# Altium PCB Battery_Schaltregler_PCB.PcbDoc
Units mm, origin at the board's own origin, x right, y up, seen from the top; angles counter-clockwise.
Board outline 60 x 40 mm, 2 copper layers (Top Layer, Bottom Layer), stack 1.671 mm thick; 24 components, 9 nets, 45 pads, 683 vias.
Unrouted connection lines stored in the file: 12.
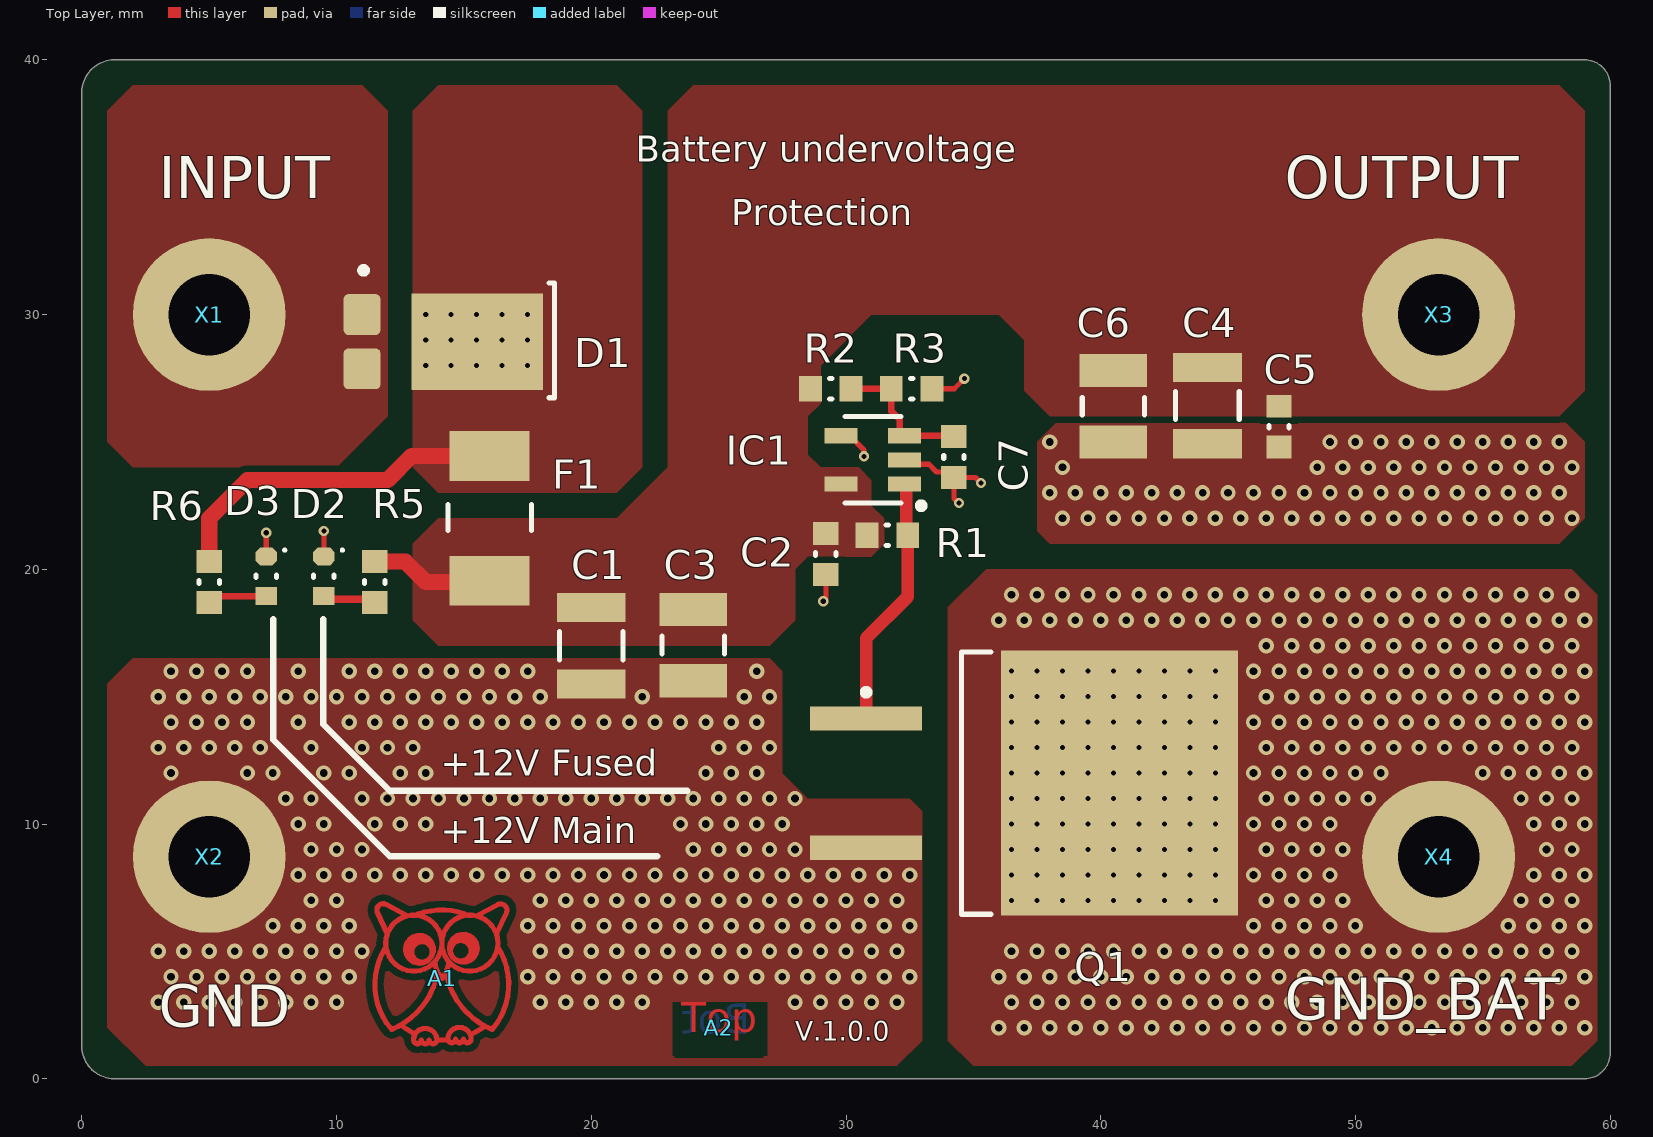
[diagram p0: Top Layer view]
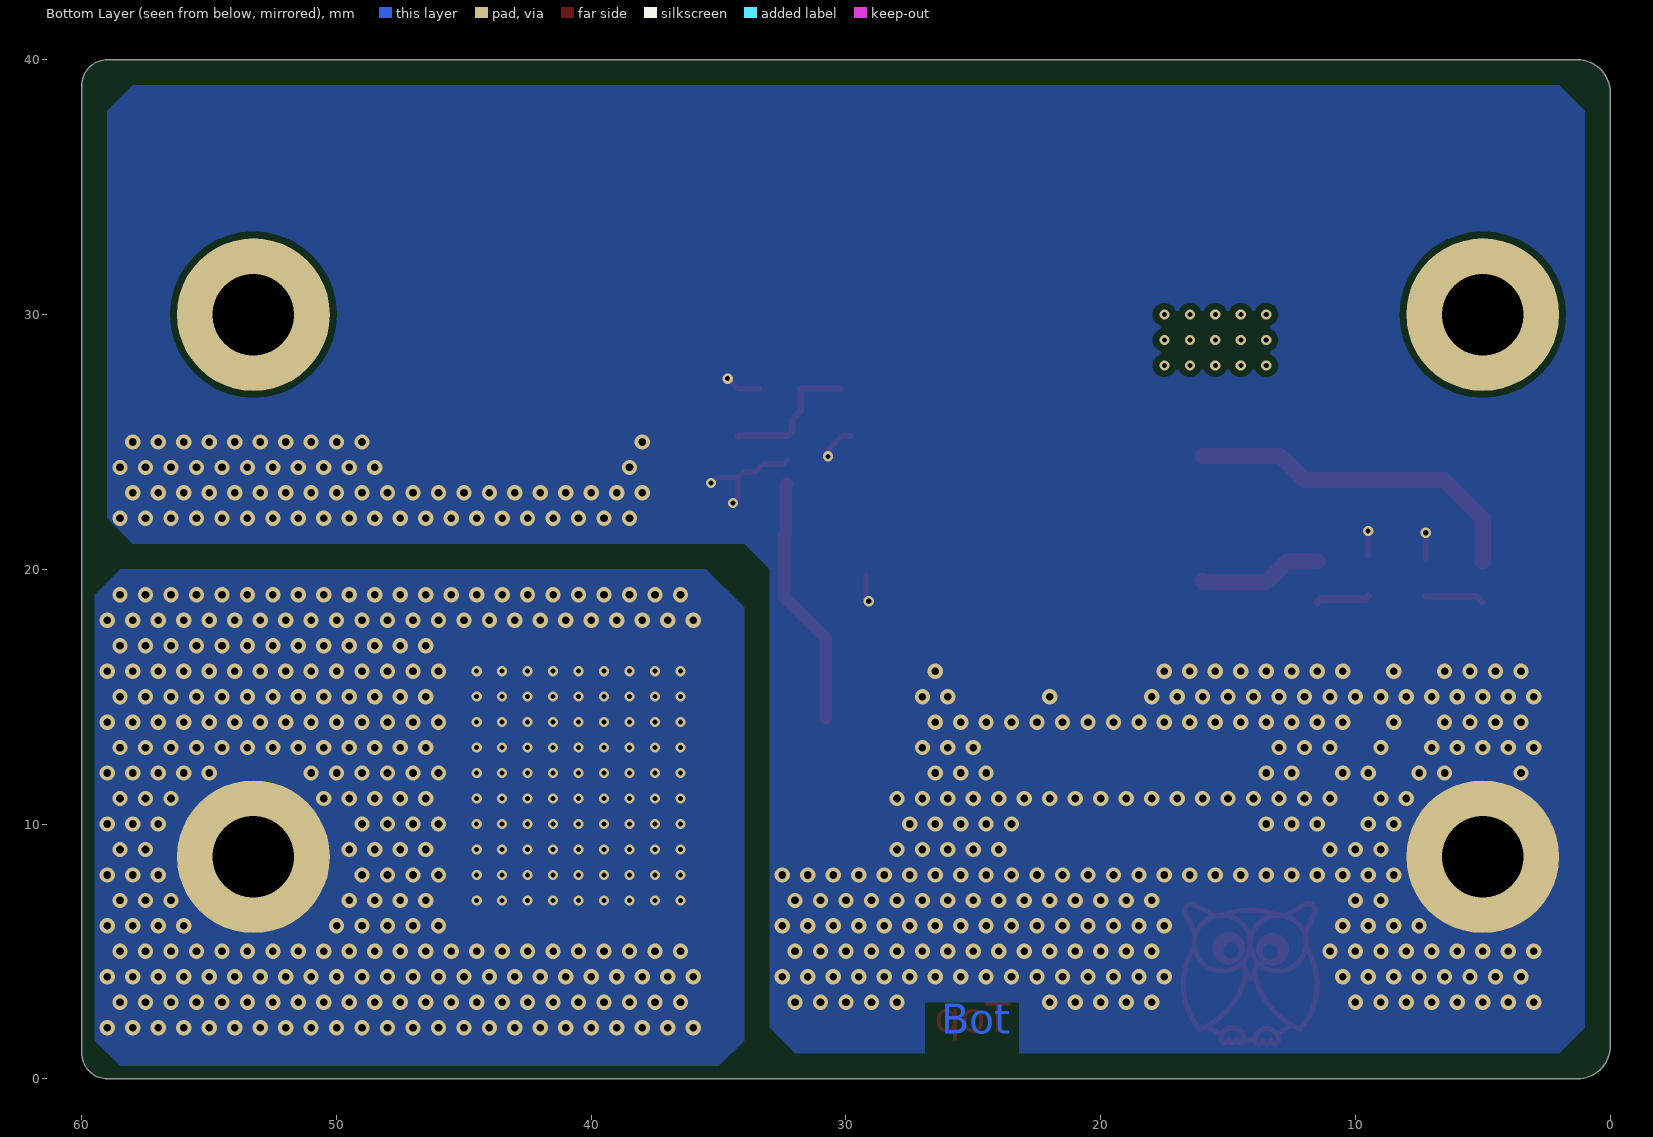
[diagram p1: Bottom Layer view, seen from below]

## Layer stack, top to bottom
Top Solder: solder mask 0.035, Solder Resist, Dk 3.5
Top Layer: signal copper 0.0356
Dielectric 1: dielectric 1.6, FR-4, Dk 4.5
Bottom Layer: signal copper 0.0356
Bottom Solder: solder mask 0.035, Solder Resist, Dk 3.5

## Board outline
0,1.27 ccw(c1.27,1.27) 1.27,0 59,0 ccw(c59,1) 60,1 60,39 ccw(c59,39) 59,40 1.27,40 ccw(c1.27,38.73) 0,38.73

## Design rules (kind name [scope] priority, off if disabled: settings)
BoardOutlineClearance [All] p1: gap=0.2 ignorepadtopadclearanceinfootprint=FALSE
Clearance [All] p1: gap=0.254 ignorepadtopadclearanceinfootprint=FALSE except(0: Arc-Hole Track-Hole SMDPad-Hole THPad-Hole Via-Hole Fill-Hole Poly-Hole Region-Hole Text-Hole)
DiffPairsRouting [All] p1: maxlimit=0.127 minlimit=0.127 mostfreqgap=0.127 toplayer_minwidth=0.136 toplayer_maxwidth=0.289 toplayer_prefwidth=0.197 bottomlayer_minwidth=0.136 bottomlayer_maxwidth=0.289 bottomlayer_prefwidth=0.197 impedanceprofiledriven=TRUE impedanceprofileid={A9F6D066-24EC-4661-9333-DF3FF1950C77} impedanceprofilevalue=100.000000 maxuncoupledlength=12.7
HoleSize [All] p1: absolutevalues=TRUE maxlimit=10 minlimit=0.2 maxpercent=80.000 minpercent=20.000
HoleToHoleClearance [All] p1: gap=0.5 allowstackedmicrovias=TRUE
MinimumSolderMaskSliver [All] p1: minsoldermaskwidth=0.2
PolygonConnect PolygonConnect_Power [InNet('Vfussed') vs InNet('Vfussed')] p1: connectstyle=Direct reliefconductorwidth=0.254 reliefentries=4 polygonreliefangle="90 Angle" airgapwidth=0.254
PolygonConnect PolygonConnect_Power_Out [InNet('Vcc_Out') vs InNet('Vcc_Out')] p2: connectstyle=Direct reliefconductorwidth=0.254 reliefentries=4 polygonreliefangle="90 Angle" airgapwidth=0.254
PolygonConnect [All] p3: connectstyle=Direct reliefconductorwidth=0.254 reliefentries=4 polygonreliefangle="90 Angle" airgapwidth=0.254
RoutingVias [All] p1: holewidth=0.2 width=0.4 viastyle="Through Hole" minholewidth=0.2 minwidth=0.4 maxholewidth=2 maxwidth=4
SilkToSilkClearance [All] p1: silktosilkclearance=0.15
SilkToSolderMaskClearance [IsPad] p1: minsilkscreentomaskgap=0.15 clearancetoexposedcopper=FALSE
SolderMaskExpansion [All] p1: expansion=0.05
UnRoutedNet [All] p1: checkbadconnections=TRUE
Width [All] p1: maxlimit=10 minlimit=0.127 preferedwidth=0.152
23 further rules are at their usual default settings.

## Components (designator, comment, footprint, x,y, rotation, side; value= is the part's Value field where it differs from the comment)
A1 "Logo_Mehdi" LOGO_MEHDI 14.148,3.937 r0 top
A2 "Stackup Window - 2 Layers" LAYER_WINDOW_2_LAYERS 25,2 r0 top
C1 "CAP-X7R_1210_25V_10uF" CAPC1210(3225)280_N 20,17 r90 top value=10µF
C2 "CAP-X7R_0603_50V_Generic" CAPC0603(1608)100_N 29.21,20.599 r90 top value=100nF
C3 "CAP-X7R_1210_25V_4.7uF" CAPC3225X20N 24,17.025 r90 top value=4.7µF
C4 "CAP-X7R_1210_25V_10uF" CAPC1210(3225)280_N 44.188,26.425 r90 top value=10µF
C5 "CAP-X7R_0603_50V_Generic" CAPC0603(1608)100_N 47,25.6 r90 top value=100nF
C6 "CAP-X7R_1210_25V_4.7uF" CAPC3225X20N 40.5,26.4 r90 top value=4.7µF
C7 "CAP-X7R_0603_50V_Generic" CAPC0603(1608)100_N 34.239,24.409 r90 top value=100nF
D1 "PMEG45U10EPDZ" DPAK213P650X82-3N 13.26,28.935 r0 top
D2 "LG L29K-G2J1-24-Z" SODFL170X85-2N 9.5,19.725 r270 top
D3 "LG L29K-G2J1-24-Z" SODFL170X85-2N 7.239,19.725 r270 top
F1 "0453010.MR" 6.10x2.69mm 16,22 r270 top
IC1 "MAX6457UKD3C+T" SOT95P280X125-5N 31.053,24.295 r180 top
Q1 "IPB60R060P7" TO263-3 36.992,11.608 r0 top
R1 "RES-0603_Generic" RESC0603(1608)_N 31.623,21.336 r0 top value=10k
R2 "RES-0603_Generic" RESC0603(1608)_N 29.402,27.089 r0 top value=1M
R3 "RES-0603_Generic" RESC0603(1608)_N 32.577,27.089 r180 top value=120k
R5 "RES-0603_Generic" RESC0603(1608)_N 11.5,19.5 r90 top value=Generic
R6 "RES-0603_Generic" RESC0603(1608)_N 5,19.5 r90 top value=Generic
X1 "SolderPad_6/3.2" SPAD_6/3.2 5,30 r0 top
X2 "SolderPad_6/3.2" SPAD_6/3.2 5,8.712 r0 top
X3 "SolderPad_6/3.2" SPAD_6/3.2 53.264,30 r0 top
X4 "SolderPad_6/3.2" SPAD_6/3.2 53.264,8.712 r0 top

## Footprints (in the part's own frame and the unit in brackets; to place one, negate y for a bottom-side part, rotate by r counter-clockwise, add the part's x,y. Pads: shape width x height; smd on the part's side, far side on the other; paste and mask are expansions set on the pad)
6.10x2.69mm [mm] "Chip Fusse Body 6.10x2.69mm, IPC Medium Density"
  rect 1.96x3.15 smd: 1(-2.45,0) 2(2.45,0)
  silkscreen extent -0.53,-1.63 0.47,1.65, body extent -1.67,-0.87 1.67,0.87, height 0.75
CAPC0603(1608)100_N [mm] "Chip Capacitor, Body 1.6x0.8mm, Height 1.0mm, IPC Medium Density"
  rect 0.9x1 smd: 1(-0.8,0) 2(0.8,0)
  silkscreen extent -0.05,-0.4 0.05,0.4, body extent -0.87,-0.48 0.88,0.47, height 1
CAPC1210(3225)280_N [mm] "Chip Capacitor, Body 3.2x2.5mm, Height 2.8mm, IPC Medium Density"
  rect 1.15x2.7 smd: 1(-1.5,0) 2(1.5,0)
  silkscreen extent -0.55,-1.25 0.55,1.25, body extent -1.7,-1.4 1.7,1.4, height 2.8
CAPC3225X20N [mm] "Chip Capacitor, 2-Leads, Body 3,20x2,50mm, IPC Medium Density"
  rect 1.3x2.65 smd: 1(-1.4,0) 2(1.4,0)
  silkscreen extent -0.35,-1.22 0.35,1.23, body extent -1.65,-1.3 1.65,1.3, height 2
DPAK213P650X82-3N [mm] "TO, 3-Pads, Body 5,50x5,56mm (max), IPC Medium Density"
  rrect25% 1.44x1.6 smd: 1(-2.26,1.065) 2(-2.26,-1.065)
  rect 5.16x3.8 smd: 3(2.26,0)
  silkscreen extent -2.32,-2.2 5.3,2.92
LAYER_WINDOW_2_LAYERS [mm] "Lagenfenster 2 Lagen"
  Top Layer pour cut-out: -1.8,1 -1.8,-1.1 1.9,-1.1 1.9,1
  Bottom Layer pour cut-out: -1.8,1 1.9,1 1.9,-1.1 -1.8,-1.1
LOGO_MEHDI [mm] "Logo Mehdi"
  Top Layer circle w0.2: c-0.793,1.044 r0.4
  Top Layer circle w0.2: c-1.117,1.385 r1.1
  Top Layer circle w0.2: c-0.893,1.144 r0.548
  Top Layer circle w0.2: c-0.839,1.093 r0.464
  Top Layer circle w0.2: c0.73,1.085 r0.4
  Top Layer circle w0.2: c1.083,1.385 r1.1
  Top Layer circle w0.2: c0.83,1.185 r0.548
  Top Layer circle w0.2: c0.775,1.134 r0.464
  Top Layer lines w0.2: -2.236,1.195 ccw(c0.054,-0.237) -1.997,-1.995 ; -2.168,1.782 -2.541,2.575 cw(c-2.317,2.685) -2.206,2.909 -1.417,2.485 ; -1.988,-2.004 ccw(c-3.134,0.769) -0.186,0.214 ; -1.613,-1.84 ccw(c0.052,0.285) -1.088,-2.163 ; -0.975,2.522 cw(c-0.017,-0.215) 0.9,2.536 ; -0.823,-2.416 cw(c-0.973,-2.416) -1.123,-2.416 cw(c-0.667,-2.416) -0.211,-2.416 cw(c-0.361,-2.416) -0.511,-2.416 ; -0.817,-2.415 ccw(c-0.667,-2.415) -0.517,-2.415 ; -0.291,0.651 ccw(c0.852,0.772) 0,0 ; -0.167,-2.407 ccw(c0.052,0.285) 0.17,-2.413 ; -0.033,0 ccw(c-0.886,0.772) 0.258,0.648 ; 0.152,0.214 ccw(c3.101,0.769) 1.955,-2.004 ; 0.524,-2.377 cw(c0.374,-2.377) 0.224,-2.377 cw(c0.68,-2.377) 1.136,-2.377 cw(c0.986,-2.377) 0.836,-2.377 ; 0.529,-2.375 ccw(c0.679,-2.375) 0.829,-2.375 ; 1.146,-2.184 ccw(c0.052,0.285) 1.675,-1.873 ; 1.391,2.475 2.181,2.9 cw(c2.291,2.675) 2.516,2.566 2.143,1.773 ; 1.963,-1.995 ccw(c-0.087,-0.237) 2.194,1.209
RESC0603(1608)_N [mm] "Chip Resistor, Body 1.6x0.8mm, IPC Medium Density"
  rect 0.9x1 smd: 1(-0.8,0) 2(0.8,0)
  silkscreen extent -0.05,-0.4 0.05,0.4, body extent -0.85,-0.47 0.85,0.47, height 0.6
SODFL170X85-2N [mm] "SOD-523F, 2-Leads, Body 0,90x1,70mm, IPC Medium Density"
  oct 0.7x0.85 smd: 1(-0.775,0)
  rect 0.7x0.85 smd: 2(0.775,0)
  silkscreen extent -1.07,-0.4 0.05,0.77, body extent -0.81,-0.4 0.81,0.4, height 0.6
SOT95P280X125-5N [mm] "SOT23, 5-Leads, Body 2,90x2,80mm, Pitch 0,95mm, IPC Medium Density"
  rect 1.3x0.6 smd: 1(-1.25,0.95) 2(-1.25,0) 3(-1.25,-0.95) 4(1.25,-0.95) 5(1.25,0.95)
  silkscreen extent -2.02,-1.7 1.1,1.92, body extent -1.5,-1.5 1.5,1.5, height 1.45
SPAD_6/3.2 [mm] "Solder Pad 6mm copper, 3.2mm hole"
  round 6 hole 3.2: 1(0,0)
TO263-3 [mm]
  rect 4.4x0.95 smd: 1(-6.2,2.54) 3(-6.2,-2.54)
  rect 9.3x10.4 smd: 2(3.75,0)
  silkscreen extent -6.32,-5.15 -1.3,5.15, body extent -2.45,-5.15 7,5.15, height 4.57

## Part data
A1: "Logo Mehdi"
A2: "Layer Stackup Window for 2 Layers (Top, Bottom)"
C1 C4: "Capacitor", ExactPartNumber=no, OpTempMax=125, OpTempMin=-55, Tolerance=20%, Voltage=25V, ComponentLink1Description=Datasheet, DesignedBy="Wilhelm Stellmach", LatestRevisionDate=03.07.2019, PackageReference="EIA 1210", PublishedDate=03.07.2019, Publisher="General Acoustics e.K", RoHS=yes, SMD/THT=SMD, SubType=X7R
C2 C5 C7: "Capacitor", ExactPartNumber=no, Tolerance=10%, Voltage=50V, ComponentLink1Description=Datasheet, DesignedBy="Wilhelm Stellmach", LatestRevisionDate=18.10.2017, PackageReference="EIA 0603", PublishedDate=18.10.2017, Publisher="General Acoustics e.K", RoHS=yes, SMD/THT=SMD, SubType=X7R
C3 C6: "Capacitor", ExactPartNumber=no, Tolerance=10%, Voltage=25V, ComponentLink1Description=Datasheet, DesignedBy="Wilhelm Stellmach", LatestRevisionDate=02.07.2019, PackageReference="EIA 1210", PublishedDate=02.07.2019, Publisher="General Acoustics e.K", RoHS=yes, SMD/THT=SMD, SubType=X7R
D1: "Shottky, 45 V, 10 A extremely low Vf barrier rectifier", Average Rectified Current=10A, Case/Package=SMD/SMT, Forward Voltage=490mV, Manufacturer 1="NXP Semiconductors", Max Operating Temperature=150°C, Max Reverse Voltage (DC)=45V, Min Operating Temperature=-55°C, Peak Non-Repetitive Surge Current=180A, Supplier Part Number 1=1727-1833-1-ND, Category="Schottky Diodes", ComponentLink1Description=http://components.arrow.com/part/dataview/65320857S809267N9188?src-supplier=Arrow+Electronics, ComponentLink1URL=http://components.arrow.com/part/dataview/65320857S809267N9188?src-supplier=Arrow+Electronics, ComponentLink2Description=http://www.nxp.com/documents/data_sheet/PMEG45U10EPD.pdf?src-supplier=Avnet, ComponentLink2URL=http://www.nxp.com/documents/data_sheet/PMEG45U10EPD.pdf?src-supplier=Avnet, ComponentLink3Description=https://assets.nexperia.com/documents/data-sheet/PMEG45U10EPD.pdf?src-supplier=Digi-Key, ComponentLink3URL=https://assets.nexperia.com/documents/data-sheet/PMEG45U10EPD.pdf?src-supplier=Digi-Key, DesignedBy="Mehdi EL Korch", Element Configuration="Common Anode", LatestRevisionDate=19.01.2022, Manufacturer Part Number 1=PMEG45U10EPDZ, Mount="Surface Mount", Number of Pins=3, Packaging="Tape and Reel", PublishedDate=19.01.2022, Publisher="Mehdi El Korch", Reverse Recovery Time=34ns, RoHS=Yes, Stock 1=459, Supplier 1=Digi-Key
D2 D3: "LED green 570nm, 4lm/W, 2.2...5.6mcd at 2mA, 3.4mW SmartLED", ExactPartNumber=yes, Manufacturer="OSRAM Opto Semiconductors", ManufacturerPartNumber="LG 29K-G2J1-24", Supplier Part Number 1=720-LGL29KG2J124Z, Voltage=1.7V, ComponentLink1Description=Datasheet, ComponentLink1URL=https://dammedia.osram.info/media/resource/hires/osram-dam-5662670/LG%20L29K_EN.pdf, DesignedBy="Marcus Schoeling", LatestRevisionDate=19.11.2021, PackageReference="EIA 0603", Pricing="1=0.463, 10=0.332, 25=0.272, 100=0.217 (EUR)", PublishedDate=19.06.2019, Publisher="General Acoustics", RoHS=yes, SMD/THT=SMD, State=Proven, SubType=LED, Supplier 1=Mouser
F1: "Fuse Chip Very Fast Acting 10A 125V SMD Solder Pad 2410 Ceramic T/R Automotive CE/CSA/PSE/UL", Case/Package=SMD/SMT, Current Rating=10A, DC Cold Resistance=5.6mR, Manufacturer 1=Littelfuse, Max Operating Temperature=125°C, Min Operating Temperature=-55°C, Package Quantity=1000, Supplier Part Number 1=F3141CT-ND, Voltage Rating (AC)=125V, Approvals=UL,CSA,PSE, Category=Fuses, ComponentLink1Description=https://datasheet.ciiva.com/26923/getdatasheetpartid-759298-26923394.pdf?src-supplier=Verical, ComponentLink1URL=https://datasheet.ciiva.com/26923/getdatasheetpartid-759298-26923394.pdf?src-supplier=Verical, ComponentLink2Description=https://datasheet.ciiva.com/1549/littelfuse-fuse-451-453-1549624.pdf?src-supplier=Element14, ComponentLink2URL=https://datasheet.ciiva.com/1549/littelfuse-fuse-451-453-1549624.pdf?src-supplier=Element14, ComponentLink3Description=https://datasheet.ciiva.com/300/littelfuse-fuse-451-453-300025.pdf?src-supplier=Digi-Key, ComponentLink3URL=https://datasheet.ciiva.com/300/littelfuse-fuse-451-453-300025.pdf?src-supplier=Digi-Key, ComponentLink4Description=https://datasheet.ciiva.com/46394/1788341-46394809.pdf?src-supplier=Element14, ComponentLink4URL=https://datasheet.ciiva.com/46394/1788341-46394809.pdf?src-supplier=Element14, ComponentLink5Description=https://datasheet.ciiva.com/300/littelfuse-fuse-451-453-300026.pdf?src-supplier=Digi-Key, ComponentLink5URL=https://datasheet.ciiva.com/300/littelfuse-fuse-451-453-300026.pdf?src-supplier=Digi-Key, ComponentLink6Description=https://datasheet.ciiva.com/16378/451-453-16378314.pdf?src-supplier=Future+Electronics, ComponentLink6URL=https://datasheet.ciiva.com/16378/451-453-16378314.pdf?src-supplier=Future+Electronics, ComponentLink7Description=https://datasheet.ciiva.com/26828/getdatasheetpartid-107149-26828650.pdf?src-supplier=Verical, ComponentLink7URL=https://datasheet.ciiva.com/26828/getdatasheetpartid-107149-26828650.pdf?src-supplier=Verical, ComponentLink8Description=https://datasheet.ciiva.com/300/littelfuse-fuse-451-453-300027.pdf?src-supplier=Digi-Key, ComponentLink8URL=https://datasheet.ciiva.com/300/littelfuse-fuse-451-453-300027.pdf?src-supplier=Digi-Key, Depth=2.69mm, DesignedBy="Mehdi El Korch", Fuse Current=10A, Fuse Type="Board Mount (Cartridge Style Excluded)", Height=0.106inch, Housing Material=Ceramic, LatestRevisionDate=15.01.2022, Lead Free="Lead Free", Length=6.1mm, Manufacturer Part Number 1=0453010.MR, Mount="Surface Mount", Number of Pins=2, Packaging="Tape and Reel", PublishedDate=15.01.2022, Publisher="Mehdi El Korch", Radiation Hardening=No, REACH SVHC="No SVHC", Resistance=5.6mR, RoHS=Yes, RoHS Compliant=Yes, Series=453, Size=2.69mm, Stock 1=3711, Supplier 1=Digi-Key, Voltage Rating (DC)=125V, Width=0.106inch, Working Voltage=125V
IC1: "Volt Supervisor Monitor 4V to 28V 5-Pin SOT-23 T/R", Case/Package=SOT-23, Manufacturer 1=Maxim, Max Operating Temperature=125°C, Max Power Dissipation=571mW, Max Reset Threshold Voltage=1.151V, Max Supply Voltage=28V, Min Operating Temperature=-40°C, Min Reset Threshold Voltage=1.071V, Min Supply Voltage=4V, Nominal Supply Current=6.5uA, Number of Voltages Monitored=1, Package Quantity=2500, Supplier Part Number 1=1913670, Category="Voltage Supervisors", ComponentLink1Description=https://datasheet.ciiva.com/1178/max6457-max6460-1178848.pdf?src-supplier=Newark, ComponentLink1URL=https://datasheet.ciiva.com/1178/max6457-max6460-1178848.pdf?src-supplier=Newark, ComponentLink2Description=https://datasheet.ciiva.com/1972/max6457-max6460-1972992.pdf?src-supplier=Digi-Key, ComponentLink2URL=https://datasheet.ciiva.com/1972/max6457-max6460-1972992.pdf?src-supplier=Digi-Key, ComponentLink3Description=https://datasheet.ciiva.com/1972/max6457-max6460-1972993.pdf?src-supplier=Digi-Key, ComponentLink3URL=https://datasheet.ciiva.com/1972/max6457-max6460-1972993.pdf?src-supplier=Digi-Key, ComponentLink4Description=https://datasheet.ciiva.com/1972/max6457-max6460-1972994.pdf?src-supplier=Digi-Key, ComponentLink4URL=https://datasheet.ciiva.com/1972/max6457-max6460-1972994.pdf?src-supplier=Digi-Key, ComponentLink5Description=https://datasheet.ciiva.com/14376/max6457-max6460-14376405.pdf?src-supplier=Avnet, ComponentLink5URL=https://datasheet.ciiva.com/14376/max6457-max6460-14376405.pdf?src-supplier=Avnet, DesignedBy="Mehdi EL korch", LatestRevisionDate=14.01.2022, Lead Free="Lead Free", Manufacturer Part Number 1=MAX6457UKD3C+T, Mount="Surface Mount", Number of Pins=5, Operating Supply Current=6.5uA, Overvoltage Threshold=1.151V, Packaging="Cut Tape", Pricing 1="5=3,42200, 10=3,07600, 25=2,92400, 100=2,40000, 250=2,14400 (EUR)", PublishedDate=14.01.2022, Publisher="Mehdi EL Korch", Radiation Hardening=No, REACH SVHC=Unknown, Reset="Active Low", Reset Timeout=90ms, RoHS=Yes, RoHS Compliant=Yes, Series="MAX6457, MAX6458, MAX6459, MAX6460", Stock 1=430, Supplier 1=RSComponents, Supply Current=6.5uA, Threshold Voltage=1.151V, Type="Simple Reset/Power-On Reset", Undervoltage Threshold=1.071V, Watchdog Timer=No
Q1: "MOSFET, N-CH, 600V, 48A, 151A Pulse, 50mOhm, Qg 67nC", ExactPartNumber=yes, Manufacturer=Infineon, Supplier Part Number 1=IPB60R060P7ATMA1CT-ND, ComponentLink1Description=Datasheet, ComponentLink1URL=https://www.infineon.com/dgdl/Infineon-IPB60R060P7-DS-v02_00-EN.pdf?fileId=5546d4625ee5d4cd015f2a6b797c047f, DesignedBy="Wilhelm Stellmach", LatestRevisionDate=15.05.2018, ManufacturerPartNumber=IPB60R060P7, PackageReference=TO263-3, Pricing="1=6.38, 10=5.694, 100=4.6693, 500=3.78096 (EUR)", PublishedDate=15.05.2018, Publisher="General Acoustics", RoHS=yes, SMD/THT=SMD, Supplier 1=Digi-Key
R1 R2 R3 R5 R6: "Resistor", ExactPartNumber=no, Tolerance=1%, ComponentLink1Description=Datasheet, DesignedBy="Wilhelm Stellmach", LatestRevisionDate=18.10.2017, PackageReference="EIA 0603", PublishedDate=18.10.2017, Publisher="General Acoustics e.K", RoHS=yes, SMD/THT=SMD, SubType="1/10 W"
X1 X2 X3 X4: "Solder Pad, 6mm copper, 3.2mm hole", ExactPartNumber=no, ManufacturerPartNumber=6/3.2, ComponentLink1Description=Datasheet, ComponentLink1URL=http://www.fischerelektronik.de/web_fischer/de_DE/Steckverbinder/G01/Stiftleisten/PR/SL%2011%20SMD%20062%204/$productCard/parameters/datasheet.xhtml, DesignedBy="Wilhelm Stellmach", LatestRevisionDate=06.06.2019, PublishedDate=06.06.2019, Publisher="General Acoustics e.K.", RoHS=yes, SMD/THT=SMD

## Via types
v1: diameter 0.6, hole 0.3, Top Layer to Bottom Layer, tented both sides, 571 vias
v2: diameter 0.4, hole 0.2, Top Layer to Bottom Layer, tented bottom, 105 vias
v3: diameter 0.4, hole 0.2, Top Layer to Bottom Layer, tented both sides, 7 vias

## Nets (pads, with @x,y where several pads share a name; then routed paths per layer and width w, separated by ;. In a path a pad name is that pad's centre, name@x,y a point inside that pad or via, vN(x,y) a via of type N, cw(c..) or ccw(c..) an arc to the next point about the centre after c; other vN are vias at no path point)
GND: C1.1 C2.1 C3.1 C4.1 C5.1 C6.1 C7.1 D2.1 D3.1 IC1.2 IC1.4 Q1.3 R3.1 X2.1 | length 10.4
  Top Layer w0.203: D3.1@7.239,20.435 v3(7.239,21.435) ; D2.1 v3(9.5,21.5) ; v3(29.108,18.745) 29.21,18.847 C2.1 ; IC1.4 30.153,25.245 30.709,24.689 v3(30.709,24.435) ; IC1.2 32.477,24.121 33.258,24.121 33.553,23.825 34.023,23.825 C7.1 ; R3.1 34.252,27.089 v3(34.646,27.483) ; v3(34.442,22.606) 34.417,22.606 34.239,22.784 C7.1 ; v3(35.306,23.393) 35.09,23.609 C7.1
  other v1: 3,3 4,3 5,3 6,3 7,3 8,3 9,3 10,3 18,3 19,3 20,3 21,3 22,3 28,3 29,3 30,3 31,3 32,3 3.5,4 4.5,4 5.5,4 6.5,4 7.5,4 8.5,4 9.5,4 10.5,4 17.5,4 18.5,4 19.5,4 20.5,4 21.5,4 22.5,4 23.5,4 24.5,4 25.5,4 26.5,4 27.5,4 28.5,4 29.5,4 30.5,4 31.5,4 32.5,4 3,5 4,5 5,5 6,5 7,5 8,5 9,5 10,5 11,5 18,5 19,5 20,5 21,5 22,5 23,5 24,5 25,5 26,5 27,5 28,5 29,5 30,5 31,5 32,5 7.5,6 8.5,6 9.5,6 10.5,6 17.5,6 18.5,6 19.5,6 20.5,6 21.5,6 22.5,6 23.5,6 24.5,6 25.5,6 26.5,6 27.5,6 28.5,6 29.5,6 30.5,6 31.5,6 32.5,6 9,7 10,7 18,7 19,7 20,7 21,7 22,7 23,7 24,7 25,7 26,7 27,7 28,7 29,7 30,7 31,7 32,7 8.5,8 9.5,8 10.5,8 11.5,8 12.5,8 13.5,8 14.5,8 15.5,8 16.5,8 17.5,8 18.5,8 19.5,8 20.5,8 21.5,8 22.5,8 23.5,8 24.5,8 25.5,8 26.5,8 27.5,8 28.5,8 29.5,8 30.5,8 31.5,8 32.5,8 9,9 10,9 11,9 24,9 25,9 26,9 27,9 28,9 8.5,10 9.5,10 11.5,10 12.5,10 13.5,10 23.5,10 24.5,10 25.5,10 26.5,10 27.5,10 8,11 9,11 11,11 12,11 13,11 14,11 15,11 16,11 17,11 18,11 19,11 20,11 21,11 22,11 23,11 24,11 25,11 26,11 27,11 28,11 3.5,12 6.5,12 7.5,12 9.5,12 10.5,12 12.5,12 13.5,12 24.5,12 25.5,12 26.5,12 3,13 4,13 5,13 6,13 7,13 9,13 11,13 12,13 13,13 25,13 26,13 27,13 3.5,14 4.5,14 5.5,14 6.5,14 8.5,14 10.5,14 11.5,14 12.5,14 13.5,14 14.5,14 15.5,14 16.5,14 17.5,14 18.5,14 19.5,14 20.5,14 21.5,14 22.5,14 23.5,14 24.5,14 25.5,14 26.5,14 3,15 4,15 5,15 6,15 7,15 8,15 9,15 10,15 11,15 12,15 13,15 14,15 15,15 16,15 17,15 18,15 22,15 26,15 27,15 3.5,16 4.5,16 5.5,16 6.5,16 8.5,16 10.5,16 11.5,16 12.5,16 13.5,16 14.5,16 15.5,16 16.5,16 17.5,16 26.5,16 38.5,22 39.5,22 40.5,22 41.5,22 42.5,22 43.5,22 44.5,22 45.5,22 46.5,22 47.5,22 48.5,22 49.5,22 50.5,22 51.5,22 52.5,22 53.5,22 54.5,22 55.5,22 56.5,22 57.5,22 58.5,22 38,23 39,23 40,23 41,23 42,23 43,23 44,23 45,23 46,23 47,23 48,23 49,23 50,23 51,23 52,23 53,23 54,23 55,23 56,23 57,23 58,23 38.5,24 48.5,24 49.5,24 50.5,24 51.5,24 52.5,24 53.5,24 54.5,24 55.5,24 56.5,24 57.5,24 58.5,24 38,25 49,25 50,25 51,25 52,25 53,25 54,25 55,25 56,25 57,25 58,25
GND_bat: Q1.2 X4.1
  other v1: 36,2 37,2 38,2 39,2 40,2 41,2 42,2 43,2 44,2 45,2 46,2 47,2 48,2 49,2 50,2 51,2 52,2 53,2 54,2 55,2 56,2 57,2 58,2 59,2 36.5,3 37.5,3 38.5,3 39.5,3 40.5,3 41.5,3 42.5,3 43.5,3 44.5,3 45.5,3 46.5,3 47.5,3 48.5,3 49.5,3 50.5,3 51.5,3 52.5,3 53.5,3 54.5,3 55.5,3 56.5,3 57.5,3 58.5,3 36,4 37,4 38,4 39,4 40,4 41,4 42,4 43,4 44,4 45,4 46,4 47,4 48,4 49,4 50,4 51,4 52,4 53,4 54,4 55,4 56,4 57,4 58,4 59,4 36.5,5 37.5,5 38.5,5 39.5,5 40.5,5 41.5,5 42.5,5 43.5,5 44.5,5 45.5,5 46.5,5 47.5,5 48.5,5 49.5,5 50.5,5 51.5,5 52.5,5 53.5,5 54.5,5 55.5,5 56.5,5 57.5,5 58.5,5 46,6 47,6 48,6 49,6 50,6 56,6 57,6 58,6 59,6 46.5,7 47.5,7 48.5,7 49.5,7 56.5,7 57.5,7 58.5,7 46,8 47,8 48,8 49,8 57,8 58,8 59,8 46.5,9 47.5,9 48.5,9 49.5,9 57.5,9 58.5,9 46,10 47,10 48,10 49,10 57,10 58,10 59,10 46.5,11 47.5,11 48.5,11 49.5,11 50.5,11 56.5,11 57.5,11 58.5,11 46,12 47,12 48,12 49,12 50,12 51,12 55,12 56,12 57,12 58,12 59,12 46.5,13 47.5,13 48.5,13 49.5,13 50.5,13 51.5,13 52.5,13 53.5,13 54.5,13 55.5,13 56.5,13 57.5,13 58.5,13 46,14 47,14 48,14 49,14 50,14 51,14 52,14 53,14 54,14 55,14 56,14 57,14 58,14 59,14 46.5,15 47.5,15 48.5,15 49.5,15 50.5,15 51.5,15 52.5,15 53.5,15 54.5,15 55.5,15 56.5,15 57.5,15 58.5,15 46,16 47,16 48,16 49,16 50,16 51,16 52,16 53,16 54,16 55,16 56,16 57,16 58,16 59,16 46.5,17 47.5,17 48.5,17 49.5,17 50.5,17 51.5,17 52.5,17 53.5,17 54.5,17 55.5,17 56.5,17 57.5,17 58.5,17 36,18 37,18 38,18 39,18 40,18 41,18 42,18 43,18 44,18 45,18 46,18 47,18 48,18 49,18 50,18 51,18 52,18 53,18 54,18 55,18 56,18 57,18 58,18 59,18 36.5,19 37.5,19 38.5,19 39.5,19 40.5,19 41.5,19 42.5,19 43.5,19 44.5,19 45.5,19 46.5,19 47.5,19 48.5,19 49.5,19 50.5,19 51.5,19 52.5,19 53.5,19 54.5,19 55.5,19 56.5,19 57.5,19 58.5,19
  other v2: 36.5,7 37.5,7 38.5,7 39.5,7 40.5,7 41.5,7 42.5,7 43.5,7 44.5,7 36.5,8 37.5,8 38.5,8 39.5,8 40.5,8 41.5,8 42.5,8 43.5,8 44.5,8 36.5,9 37.5,9 38.5,9 39.5,9 40.5,9 41.5,9 42.5,9 43.5,9 44.5,9 36.5,10 37.5,10 38.5,10 39.5,10 40.5,10 41.5,10 42.5,10 43.5,10 44.5,10 36.5,11 37.5,11 38.5,11 39.5,11 40.5,11 41.5,11 42.5,11 43.5,11 44.5,11 36.5,12 37.5,12 38.5,12 39.5,12 40.5,12 41.5,12 42.5,12 43.5,12 44.5,12 36.5,13 37.5,13 38.5,13 39.5,13 40.5,13 41.5,13 42.5,13 43.5,13 44.5,13 36.5,14 37.5,14 38.5,14 39.5,14 40.5,14 41.5,14 42.5,14 43.5,14 44.5,14 36.5,15 37.5,15 38.5,15 39.5,15 40.5,15 41.5,15 42.5,15 43.5,15 44.5,15 36.5,16 37.5,16 38.5,16 39.5,16 40.5,16 41.5,16 42.5,16 43.5,16 44.5,16
NetC7_2: C7.2 IC1.3 R2.2 R3.2 | length 5.6
  Top Layer w0.254: R2.2 R3.2 31.777,26.211 32.106,25.883 32.106,25.418 32.279,25.245 IC1.3 34.204,25.245 C7.2
NetD2_2: D2.2 R5.1 | length 2.1
  Top Layer w0.305: D2.2 9.625,18.825 11.375,18.825 R5.1
NetD3_2: D3.2 R6.1 | length 2.3
  Top Layer w0.254: R6.1 5.25,18.95 D3.2
NetIC1_1: IC1.1 Q1.1 R1.2 | length 9.9
  Top Layer w0.5: Q1.1 30.792,17.292 32.423,18.923 R1.2 32.363,21.396 32.363,23.295 32.313,23.345 IC1.1
Vfussed: C1.2 C2.2 C3.2 C4.2 C5.2 C6.2 F1.2 IC1.5 R1.1 R2.1 R5.2 X3.1 | length 4.9
  Top Layer w0.635: R5.2 12.7,20.3 13.5,19.5 15.95,19.5 F1.2
Vin: D1.1 D1.2 X1.1
Vmain: D1.3 F1.1 R6.2 | length 13.7
  Top Layer w0.635: R6.2 5,22 6.5,23.5 12,23.5 12.95,24.45 F1.1
  other v2: 13.5,28 14.5,28 15.5,28 16.5,28 17.5,28 13.5,29 14.5,29 15.5,29 16.5,29 17.5,29 13.5,30 14.5,30 15.5,30 16.5,30 17.5,30

## Polygon pours and split planes (outlines as drawn)
GND_bat on Top Layer "GND_BAT_Bottem" (solid, pour order 42): 35.5,20 34,18.5 34,1.5 35,0.5 58.5,0.5 59.5,1.5 59.5,19 58.5,20
GND on Top Layer "GND-TOP-IN" (solid, pour order 26): 27,16.5 27.5,16 27.5,12 28.5,11 32.5,11 33,10.5 33,1.5 32,0.5 2.5,0.5 1,2 1,15.5 2,16.5
Vfussed on Top Layer "Vfussed-Top" (solid, pour order 20): 14,22 13,21 13,18 14,17 27,17 28,18 28,20 28.5,20.5 30.25,20.5 31,20.5 31.5,21 31.5,22 31,22.5 31,23.5 30.5,24 29,24 28.5,24.5 28.5,26 29,26.5 29,28 31,30 36,30 37,29 37,27 38,26 58,26 59,27 59,38 58,39 24,39 23,38 23,24 22,23 21,22
Vin on Top Layer "Vin-TOP" (solid, pour order 16): 1,38 2,39 11,39 12,38 12,26 10,24 2,24 1,25
GND on Top Layer "GND-TOP-OUT" (solid, pour order 28): 37.5,25 38.25,25.75 58.25,25.75 59,25 59,22 58,21 38,21 37.5,21.5
no net on Top Layer "test" (solid, pour order 22): 32.303,23.345
Vmain on Top Layer "Vmain-Top" (solid, pour order 18): 13,38 14,39 21,39 22,38 22,24 21,23 14,23 13,24
no net on Top Layer "test" (solid, pour order 12): 20,25
no net on Top Layer "test" (solid, pour order 2): 36.946,14.516
GND_bat on Bottom Layer "GND_BAT_Bottem" (solid, pour order 40): 35.5,20 34,18.5 34,1.5 35,0.5 58.5,0.5 59.5,1.5 59.5,19 58.5,20
GND on Bottom Layer "GND-Bottem" (solid, pour order 36): 2,39 1,38 1,2 2,1 32,1 33,2 33,20 34,21 58,21 59,22 59,38 58,39
no net on Bottom Layer "test" (solid, pour order 34): 2,39
no net on Bottom Layer "test" (solid, pour order 32): 3,39
no net on Bottom Layer "test" (solid, pour order 30): 2,39

## Silkscreen, mask and mechanical layers (free items; w line width, h text height)
Top Overlay:
  lines w0.254: 7.518,18.034 7.518,13.665 7.518,13.31 12.09,8.738 22.581,8.738 ; 9.474,18.034 9.474,13.919 12.09,11.303 23.774,11.303
  text "Battery undervoltage" at 21.754,36 h1.02
  text "INPUT" at 3.023,34.569 h1.65
  text "OUTPUT" at 47.219,34.569 h1.65
  text "Protection" at 25.5,33.5 h1.02
  text "+12V Fused" at 14.097,11.887 h1.02
  text "+12V Main" at 14.097,9.246 h1.02
  text "GND_BAT" at 47.219,2.307 h1.65
  text "GND" at 3.023,2.032 h1.65
  text "V.1.0.0" at 28,1.5 h0.76
M1 Board Outline:
  lines w0.4: 60,1 cw(c59,1) 59,0 1.27,0 cw(c1.27,1.27) 0,1.27 0,38.73 cw(c1.27,38.73) 1.27,40 3,40 59,40 cw(c59,39) 60,39 60,1 ; 60,1 60,1
M2 Info:
  lines w0.254: 0.104,42.746 0.104,43.254 ; 1.628,42.492 0.104,43 ; 1.628,43.508 0.104,43 ; 28.127,43 0.104,43 ; 32.081,43 60.104,43 ; 58.58,42.492 60.104,43 ; 58.58,43.508 60.104,43 ; 60.104,42.746 60.104,43.254 ; 63.492,1.42 64,-0.104 ; 63.492,38.372 64,39.896 ; 63.746,-0.104 64.254,-0.104 ; 63.746,39.896 64.254,39.896 ; 64,17.9 64,-0.104 ; 64,21.893 64,39.896 ; 64.508,1.42 64,-0.104 ; 64.508,38.372 64,39.896
  text "60mm" at 28.381,42.528 h1.52
  text "40mm" at 64.472,18.154 h1.52 r90

## Text inside footprints (layer, text, board x,y; h text height)
A2: Top Layer "Top" at 23.526,1.433 h2; Bottom Layer "Bot" at 26.269,1.369 h2